# EAGLE board Home Automation-S3Y (EAGLE 9.7.0)

Size 241.87 x 141.44 mm. Coordinates in mm from the lower left corner, seen from the top.
Outline: 0,0 241.87,0 241.87,141.44 0,141.44 0,0
Copper layers (1*16): Top 0.035mm / dielectric 1.5mm / Bottom 0.035mm
Design rules "default": minimum track width 6mil, minimum drill 0.35mm, track to track 6mil, track to pad 6mil, pad to pad 6mil, via to via 6mil, smd to smd 6mil, copper to edge 40mil, drill to drill 6mil, minimum pad ring 10mil, minimum via ring 8mil, stop-mask expansion 4mil, vias tented up to drill 0mil, thermal gap 10mil

## Footprints (pad centres in the part's own frame; a part is rotated, then mirrored left to right if it is on the bottom)
LEDRD254W60D565H860B = drill 0.981 pad 1.581: 1 -1.27,0; 2 1.27,0
LEDRD254W60D565H860B_B = drill 0.981 pad 1.581: 1 -1.27,0; 2 1.27,0
LEDRD254W60D565H860B_G = drill 0.981 pad 1.581: 1 -1.27,0; 2 1.27,0
LEDRD254W60D565H860B_Y = drill 0.981 pad 1.581: 1 -1.27,0; 2 1.27,0
MOTOR = drill 1.118 pad 3.15 octagon: + 2.54,0; - -2.54,0
PIEZO = drill 1 pad 1.6: 1 -3.5,0; 2 3.5,0
28015 = drill 1.016 long: 1 -2.54,0; 2 0,0; 3 2.54,0
28027 = drill 1.016 long: 1 -2.54,0; 2 0,0; 3 2.54,0
RESAD1016W63L850D250B = drill 0.83 pad 1.43: 1 -5.08,0; 2 5.08,0
SG90 = drill 1.016 long: 1 -2.54,0; 2 0,0; 3 2.54,0
ARDUINO-UNO-R3-SHIELD = drill 1.016 pad 1.88: 3.3V 24.13,-2.54; 5V 24.13,0; A0 24.13,12.7; A1 24.13,15.24; A2 24.13,17.78; A3 24.13,20.32; A4 24.13,22.86; A5 24.13,25.4; AREF -24.13,-13.97; D2 -24.13,20.32; D3 -24.13,17.78; D4 -24.13,15.24; D5 -24.13,12.7; D6 -24.13,10.16; D7 -24.13,7.62; D8 -24.13,3.81; D9 -24.13,1.27; D10 -24.13,-1.27; D11 -24.13,-3.81; D12 -24.13,-6.35; D13 -24.13,-8.89; GND@0 24.13,2.54; GND@1 24.13,5.08; GND@2 -24.13,-11.43; IOREF 24.13,-7.62; NC 24.13,-10.16; RES 24.13,-5.08; RX -24.13,25.4; SCL -24.13,-19.05; SDA -24.13,-16.51; TX -24.13,22.86; VIN 24.13,7.62
TO92 = drill 0.813 octagon: 1 -1.27,0; 2 0,1.905; 3 1.27,0
DIP762W53P254L1969H508Q16B = drill 0.743 pad 1.343: 1 -3.81,8.89; 2 -3.81,6.35; 3 -3.81,3.81; 4 -3.81,1.27; 5 -3.81,-1.27; 6 -3.81,-3.81; 7 -3.81,-6.35; 8 -3.81,-8.89; 9 3.81,-8.89; 10 3.81,-6.35; 11 3.81,-3.81; 12 3.81,-1.27; 13 3.81,1.27; 14 3.81,3.81; 15 3.81,6.35; 16 3.81,8.89

## Placement (x,y rotation side)
D1  RED  [LEDRD254W60D565H860B]  180.93,23.29 180 top
D2  BLUE  [LEDRD254W60D565H860B_B]  180.93,25.83 180 top
D3  GREEN  [LEDRD254W60D565H860B_G]  180.93,20.75 180 top
D4  YELLOW  [LEDRD254W60D565H860B_Y]  180.93,18.21 180 top
D5  RED  [LEDRD254W60D565H860B]  132.67,8.05 180 top
D6  YELLOW  [LEDRD254W60D565H860B_Y]  130.13,20.75 180 top
D7  RED  [LEDRD254W60D565H860B]  39.06,133.53 180 top
D8  BLUE  [LEDRD254W60D565H860B_B]  137.75,8.05 180 top
D9  GREEN  [LEDRD254W60D565H860B_G]  142.83,8.05 180 top
M1  MOTOR_HDR  [MOTOR]  233.61,24.84 0 top
PIEZO1  PIEZO  [PIEZO]  11.73,122.72 0 top
PING1  DISTANCE-SENSOR-3PIN  [28015]  141.65,71.02 0 top
PIR1  PIR-SENSOR_28027  [28027]  215.93,87.61 0 top
R1  1k  [RESAD1016W63L850D250B]  187.28,25.83 0 top
R2  1k  [RESAD1016W63L850D250B]  40.86,123.02 90 top
SERVO2  SERVOSG90  [SG90]  154.48,56.83 90 top
U1  ARDUINO-UNO-R3-SHIELD  [ARDUINO-UNO-R3-SHIELD]  72.44,75.69 270 top
U2  TMP36GT9Z_TO92  [TO92]  104.6,26.42 0 top
U3  L293E  [DIP762W53P254L1969H508Q16B]  158.07,22.02 90 top

## Library data of the parts
D1 D5 D7 = Tinkercad; CATEGORY: Opto-Electronic; SUB-CATEGORY: LED; VALUE: LED_RED
D2 D8 = Tinkercad; CATEGORY: Opto-Electronic; SUB-CATEGORY: LED; VALUE: LED_BLUE
D3 D9 = Tinkercad; CATEGORY: Opto-Electronic; SUB-CATEGORY: LED; VALUE: LED_GREEN
D4 D6 = Tinkercad; CATEGORY: Opto-Electronic; SUB-CATEGORY: LED; VALUE: LED_YELLOW
M1 PIEZO1 PING1 PIR1 R1 R2 SERVO2 U1-U3 = Tinkercad

## Nets
D2_A: D1.1 D2.1 D3.1 D4.1 R1.1
D7_A: D7.1 R2.2
M1_+: M1.+ U3.6 U3.11
M1_-: M1.- U3.3 U3.14
U1_5V: PING1.2 PIR1.2 SERVO2.2 U1.5V U2.3 U3.1 U3.16
U1_A0: U1.A0 U2.2
U1_D2: PIR1.1 U1.D2
U1_D4: R1.2 U1.D4
U1_D7: PING1.3 U1.D7
U1_D8: SERVO2.3 U1.D8
U1_D10: PIEZO1.1 R2.1 U1.D10
U1_D11: U1.D11 U3.8 U3.9
U1_D12: U1.D12 U3.7 U3.10
U1_D13: U1.D13 U3.2 U3.15
U1_GND: D1.2 D2.2 D3.2 D4.2 D7.2 PIEZO1.2 PING1.1 PIR1.3 SERVO2.1 U1.GND@0 U1.GND@1 U1.GND@2 U2.1 U3.4 U3.5 U3.12 U3.13

## Tracks (layer width: path | path; a pad name or v marks a point on that pad's centre or on a via)
D2_A  (4 unrouted)
D7_A  (1 unrouted)
M1_+  (2 unrouted)
M1_-  (2 unrouted)
U1_5V  (6 unrouted)
U1_A0  (1 unrouted)
U1_D2  (1 unrouted)
U1_D4  (1 unrouted)
U1_D7  (1 unrouted)
U1_D8  (1 unrouted)
U1_D10  (2 unrouted)
U1_D11  (2 unrouted)
U1_D12  (2 unrouted)
U1_D13  (2 unrouted)
U1_GND  (16 unrouted)